# Altium PCB 14871_V1I1.PcbDoc (part 2 of 2)
Units mm, origin at the board's own origin, x right, y up, seen from the top; angles counter-clockwise.
Board outline 80 x 35 mm, 2 copper layers (L1, L2), stack 1.671 mm thick; 58 components, 31 nets, 145 pads, 63 vias.
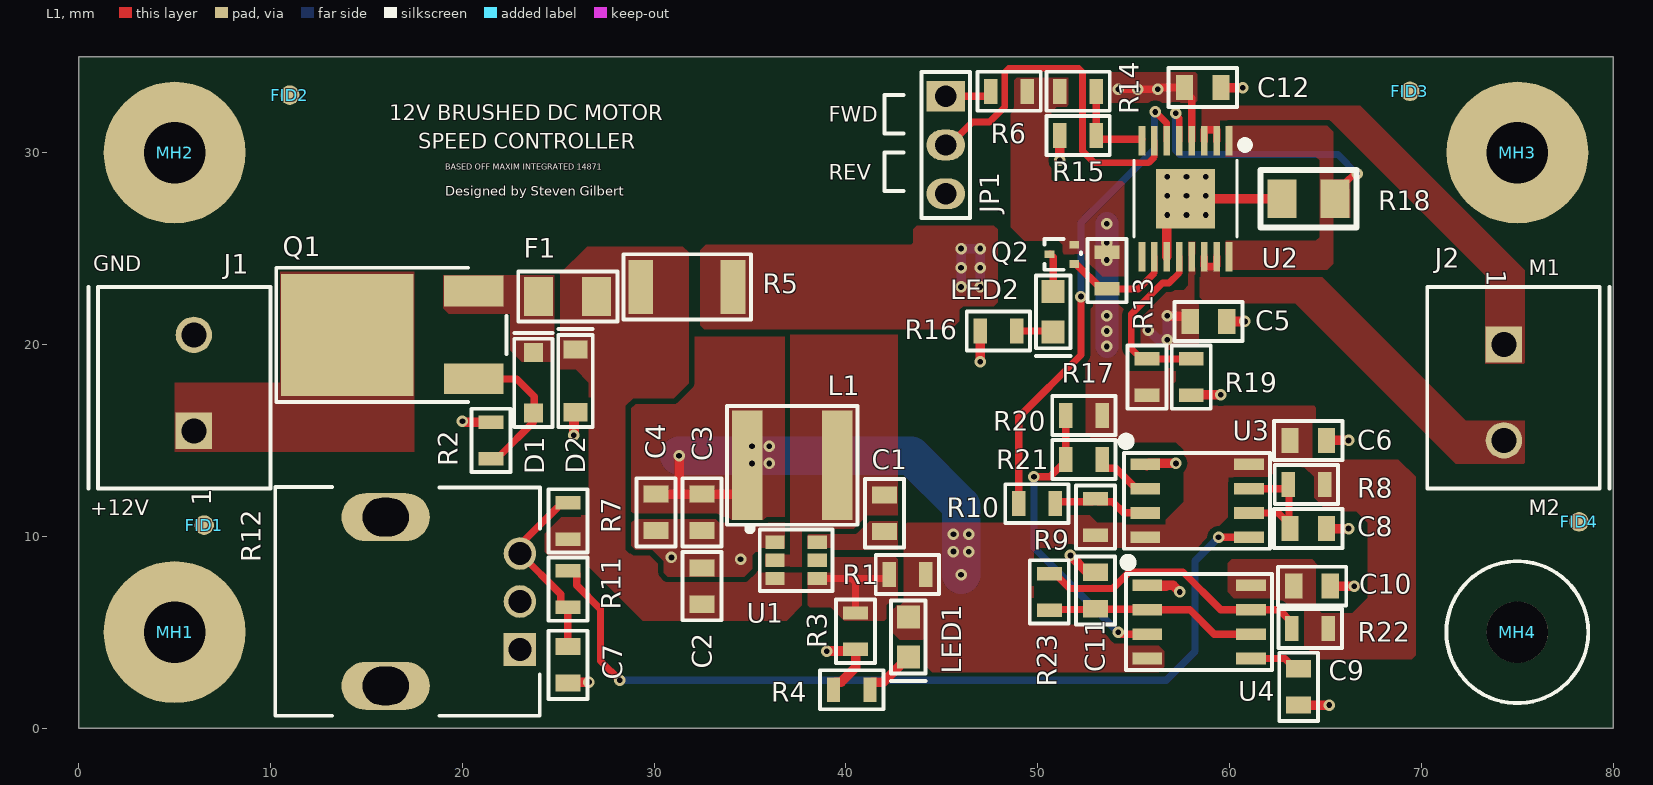
[diagram p0: L1 view]

## Part data (continued)
R14: library part RC0805JR-075K6L, "RES SMD 5K6 OHM 5% 1/8W 0805  Thick Film ±100ppm/C Pad SMD T/R", Case Code (Imperial)=0805, Case Code (Metric)=2012, Manufacturer=Yageo, Max Operating Temperature=155°C, Max Power Dissipation=125mW, Min Operating Temperature=-55°C, Package Quantity=5000, Resistance=5.6kR, Resistance Tolerance=5%, Resistor Type="Thick Film", Supplier Part Number 1=311-5.6KARCT-ND, Temperature Coefficient=100ppm/°C, Voltage Rating=150V, Case/Package=0805, Category="Chip SMD Resistors", ComponentLink1Description=https://datasheet.ciiva.com/2519/pyu-r-int-thick-7-2519283.pdf?src-supplier=Digi-Key, ComponentLink1URL=https://datasheet.ciiva.com/2519/pyu-r-int-thick-7-2519283.pdf?src-supplier=Digi-Key, ComponentLink2Description=https://datasheet.ciiva.com/2519/pyu-r-int-thick-7-2519284.pdf?src-supplier=Digi-Key, ComponentLink2URL=https://datasheet.ciiva.com/2519/pyu-r-int-thick-7-2519284.pdf?src-supplier=Digi-Key, ComponentLink3Description=https://datasheet.ciiva.com/2519/pyu-r-int-thick-7-2519282.pdf?src-supplier=Digi-Key, ComponentLink3URL=https://datasheet.ciiva.com/2519/pyu-r-int-thick-7-2519282.pdf?src-supplier=Digi-Key, ComponentLink4Description=https://datasheet.ciiva.com/15190/getdatasheetpartid-348583-15190060.pdf?src-supplier=Verical, ComponentLink4URL=https://datasheet.ciiva.com/15190/getdatasheetpartid-348583-15190060.pdf?src-supplier=Verical, ComponentLink5Description=https://datasheet.ciiva.com/17086/rc0805-17086095.pdf?src-supplier=Future+Electronics, ComponentLink5URL=https://datasheet.ciiva.com/17086/rc0805-17086095.pdf?src-supplier=Future+Electronics, Construction=Rectangular, Contact Plating=Tin,Lead, Depth=1.25mm, Features="Moisture Resistant", Height=0.5mm, Lead Free="Lead Free", Length=2mm, Manufacturer Part Number=RC0805JR-075K6L, Military Standard=Not, Number of Terminations=2, Packaging="Tape and Reel", Power Rating=125mW, Pricing 1="1=0.100000, 10=0.032000, 100=0.013000, 1000=0.005840, 2500=0.005070 (USD)", Radiation Hardening=No, RoHS=Yes, RoHS Compliant=Yes, Series=RC, Size Code=0805, Stock 1=166799, Supplier 1=Digi-Key, Termination=SMD/SMT, Tolerance=5%, Width=1.25mm
R17: library part RC0805FR-074K02L, "RES SMD 4K02 OHM 1% 1/8W 0805 Thick Film 2.0 x 1.2 mm 100ppm/ C Molded SMD Paper T/R", Case Code (Imperial)=0805, Case Code (Metric)=2012, Manufacturer=Yageo, Max Operating Temperature=155°C, Max Power Dissipation=125mW, Min Operating Temperature=-55°C, Resistance=4.02kR, Resistor Type="Thick Film", Supplier Part Number 1=311-4.02KCRCT-ND, Temperature Coefficient=100ppm/°C, Tolerance=1%, Voltage Rating=150V, Case/Package=0805, Category="Chip SMD Resistors", ComponentLink1Description=https://datasheet.ciiva.com/11808/0900766b8106beab-11808579.pdf?src-supplier=RSComponents, ComponentLink1URL=https://datasheet.ciiva.com/11808/0900766b8106beab-11808579.pdf?src-supplier=RSComponents, ComponentLink2Description=https://datasheet.ciiva.com/12667/rc0805-12667015.pdf?src-supplier=Mouser, ComponentLink2URL=https://datasheet.ciiva.com/12667/rc0805-12667015.pdf?src-supplier=Mouser, ComponentLink3Description=https://datasheet.ciiva.com/15189/getdatasheetpartid-342839-15189978.pdf?src-supplier=Verical, ComponentLink3URL=https://datasheet.ciiva.com/15189/getdatasheetpartid-342839-15189978.pdf?src-supplier=Verical, ComponentLink4Description=https://datasheet.ciiva.com/16771/rc0805-16771996.pdf?src-supplier=Future+Electronics, ComponentLink4URL=https://datasheet.ciiva.com/16771/rc0805-16771996.pdf?src-supplier=Future+Electronics, Construction=Rectangular, Depth=1.25mm, Features="Moisture Resistant", Height=0.5mm, Lead Free="Lead Free", Length=2mm, Manufacturer Part Number=RC0805FR-074K02L, Military Standard=Not, Mount="Surface Mount", Number of Terminations=2, Packaging="Tape and Reel", Power Rating=125mW, Pricing 1="1=0.10000, 10=0.03600, 100=0.01480, 1000=0.00666, 2500=0.00578 (USD)", RoHS=Yes, RoHS Compliant=Yes, Series=RC, Size Code=0805, Stock 1=404687, Supplier 1=Digi-Key, Technology="THICK FILM", Termination=SMD/SMT, Voltage Rating (DC)=150V
R18: library part VSRP1206S1-R100F, "RES SENSE SMD 0R1 OHM 1% 1W 1206", Manufacturer=Cyntec, Package=1206, Supplier Part Number 1=2037-VSRP1206S1-R100FCT-ND, Tolerance=1%, Category="Chip SMD Resistors", Manufacturer Part Number=VSRP1206S1-R100F, Pricing 1="1=0.57000, 10=0.47700, 25=0.40920, 50=0.36820, 100=0.32040, 250=0.28632, 500=0.23180, 1000=0.18748 (USD)", RoHS=Yes, Stock 1=23192, Supplier 1=Digi-Key
R22: library part RC0805FR-073KL, "RES SMD 3K OHM 1% 1/8W 0805 Thick Film ±100ppm/C Pad SMD T/R", Case Code (Imperial)=0805, Case Code (Metric)=2012, Manufacturer=Yageo, Max Operating Temperature=155°C, Max Power Dissipation=125mW, Min Operating Temperature=-55°C, Package Quantity=1, Resistance=3kR, Resistor Type="Thick Film", Supplier Part Number 1=311-3.00KCRCT-ND, Temperature Coefficient=100ppm/°C, Tolerance=1%, Voltage Rating=150V, Case/Package=0805, Category="Chip SMD Resistors", ComponentLink1Description=https://datasheet.ciiva.com/2457/pyu-r-int-thick-7-2457135.pdf?src-supplier=Digi-Key, ComponentLink1URL=https://datasheet.ciiva.com/2457/pyu-r-int-thick-7-2457135.pdf?src-supplier=Digi-Key, ComponentLink2Description=https://datasheet.ciiva.com/2457/pyu-r-int-thick-7-2457136.pdf?src-supplier=Digi-Key, ComponentLink2URL=https://datasheet.ciiva.com/2457/pyu-r-int-thick-7-2457136.pdf?src-supplier=Digi-Key, ComponentLink3Description=https://datasheet.ciiva.com/2457/pyu-r-int-thick-7-2457134.pdf?src-supplier=Digi-Key, ComponentLink3URL=https://datasheet.ciiva.com/2457/pyu-r-int-thick-7-2457134.pdf?src-supplier=Digi-Key, ComponentLink4Description=https://datasheet.ciiva.com/5558/rc0805-5558124.pdf?src-supplier=Mouser, ComponentLink4URL=https://datasheet.ciiva.com/5558/rc0805-5558124.pdf?src-supplier=Mouser, ComponentLink5Description=https://datasheet.ciiva.com/17043/rc0805-17043750.pdf?src-supplier=Future+Electronics, ComponentLink5URL=https://datasheet.ciiva.com/17043/rc0805-17043750.pdf?src-supplier=Future+Electronics, Construction=Rectangular, Depth=1.25mm, Features="Moisture Resistant", Height=0.024inch, Lead Free="Lead Free", Length=2mm, Manufacturer Part Number=RC0805FR-073KL, Military Standard=Not, Mount="Surface Mount", Number of Terminations=2, Packaging="Tape and Reel", Power Rating=125mW, Pricing 1="1=0.10000, 10=0.03600, 100=0.01480, 1000=0.00666, 2500=0.00578 (USD)", RoHS=Yes, RoHS Compliant=Yes, Series=RC, Size Code=0805, Stock 1=518249, Supplier 1=Digi-Key, Termination=SMD/SMT, Voltage Rating (DC)=150V, Width=0.049inch
U1: "4.2V to 18V Input 2A Low IQ Synchronous Buck Converter 6-Pin TSOT-26 T/R", Manufacturer=Diodes, Supplier Part Number 1=31-AP62200WU-7CT-ND, Category="Voltage Regulators - Switching", Manufacturer Part Number=AP62200WU-7, Pricing 1="1=0.43000, 10=0.37100, 25=0.34600, 100=0.27690, 250=0.25712, 500=0.21758, 1000=0.16813 (USD)", RoHS=Yes, RoHS Compliant=Yes, Stock 1=508009, Supplier 1=Digi-Key
U2: "IC Motor Driver 4.5V-36V 16TSSOP", Manufacturer="Analog Devices", Supplier Part Number 1=MAX14871EUE+CT-ND, Category=Uncategorized, Manufacturer Part Number=MAX14871EUE+T, Pricing 1="1=5.19000, 10=4.66500, 25=4.41000, 100=3.82200, 250=3.62600, 500=3.25360, 1000=2.94000 (USD)", RoHS=No, Stock 1=2369, Supplier 1=Digi-Key
U3 U4: "IC OSC SGL TIMER 100KHZ 8-SOIC", Case/Package=SOIC, Frequency=100kHz, High Level Output Current=-200mA, Low Level Output Current=200mA, Manufacturer="Texas Instruments", Max Operating Temperature=70°C, Max Supply Voltage=16V, Min Operating Temperature=0°C, Min Supply Voltage=4.5V, Operating Supply Current=10mA, Package Quantity=1, Quiescent Current=15mA, Supplier Part Number 1=296-6501-1-ND, Category="Timers and Oscillators", ComponentLink1Description=https://datasheet.ciiva.com/46395/1874740-46395978.pdf?src-supplier=Element14, ComponentLink1URL=https://datasheet.ciiva.com/46395/1874740-46395978.pdf?src-supplier=Element14, ComponentLink2Description=https://datasheet.ciiva.com/1233/ne555-1233132.pdf?src-supplier=Digi-Key, ComponentLink2URL=https://datasheet.ciiva.com/1233/ne555-1233132.pdf?src-supplier=Digi-Key, ComponentLink3Description=https://datasheet.ciiva.com/1233/ne555-1233131.pdf?src-supplier=Digi-Key, ComponentLink3URL=https://datasheet.ciiva.com/1233/ne555-1233131.pdf?src-supplier=Digi-Key, ComponentLink4Description=https://datasheet.ciiva.com/1233/ne555-1233133.pdf?src-supplier=Digi-Key, ComponentLink4URL=https://datasheet.ciiva.com/1233/ne555-1233133.pdf?src-supplier=Digi-Key, ComponentLink5Description=https://datasheet.ciiva.com/1139/1874740-1139901.pdf?src-supplier=Element14, ComponentLink5URL=https://datasheet.ciiva.com/1139/1874740-1139901.pdf?src-supplier=Element14, Contact Plating=Gold, Height=1.58mm, Lead Free="Lead Free", Length=4.9mm, Manufacturer Part Number=NE555DR, Mount="Surface Mount", Number of Pins=8, Number of Timers/Counters=1, Packaging="Tape and Reel", Pricing 1="1=0.46000, 10=0.34300, 25=0.30880, 100=0.21350, 250=0.17976, 500=0.14606, 1000=0.11236 (USD)", Radiation Hardening=No, Reach SVHC Compliant=Yes, RoHS=Yes, RoHS Compliant=Yes, Series=-, Stock 1=369283, Supplier 1=Digi-Key, Weight=0.002561oz, Width=3.91mm

## Via types
v1: diameter 0.6, hole 0.3, L1 to L2, tented both sides, 63 vias

## Nets (pads, with @x,y where several pads share a name; then routed paths per layer and width w, separated by ;. In a path a pad name is that pad's centre, name@x,y a point inside that pad or via, vN(x,y) a via of type N, cw(c..) or ccw(c..) an arc to the next point about the centre after c; other vN are vias at no path point)
28KHZ_CLOCK: R20.2 R21.2 U4.3 | length 15.8
  L1 w0.381: v1(49.8,13.1) 50.639,13.1 51.45,13.911 R21.2 R20.2 ; v1(54.2,5) 54.3,4.9 U4.3
  L2 w0.381: v1(49.8,13.1) 49.8,9.4 v1(54.2,5)
28KHZ_CLOCK_R: R21.1 U3.2 | length 3
  L1 w0.381: R21.1 53.35,13.7 53.509,13.54 54.07,13.54 55.125,12.485 U3.2
555_PWM: R9.2 R10.2 U3.3 | length 5.1
  L1 w0.381: R10.2 51,11.8 52.85,11.8 R9.2 53.148,11.802 53.898,11.802 54.477,11.223 55.587,11.223 U3.3
555_PWM_R: R10.1 U2.6 | length 25.1
  L1 w0.356: v1(56.126,32.123) 56.126,32.115 56.725,31.516 U2.6
  L1 w0.381: R10.1 49,16.2 52.25,19.45 v1(52.25,22.5)
  L2 w0.381: v1(52.25,22.5) 52.25,26.35 52.609,26.709 ; 52.609,26.71 53.19,27.291 56.084,30.184 56.084,32.081 v1(56.126,32.123)
+5V: C3.2 C4.2 C6.1 C10.1 L1.2 LED1.A Q2.S R1.1 R6.1 R8.1 R9.1 R13.1 R14.1 R17.1 R20.1 R22.1 U3.4 U3.8 U4.4 U4.8 | length 33.7
  L1 w0.5: C4.2 31.3,12.2 ; v1(31.3,14.2) 31.3,12.2 ; L1.2 34.85,12.75 34.3,12.2 C3.2 31.3,12.2
  L2 w1.2: v1(53.6,19.9) v1(53.6,26.3)
  L2 w2: v1(31.3,14.2) 43.4,14.2 46,11.6 v1(46,8)
  other v1: 45.6,9.203 46.4,9.2 45.6,10.1 46.4,10.1 35.1,13.8 36,13.8 35.1,14.7 36,14.7 53.6,20.7 53.6,21.5 53.6,24.4 53.6,25.3
+12V: C2.2 D2.K F1.2 R5.2 R7.1 U1.3
+12V_DRIVER: C5.2 C12.2 R5.1 U2.4 U2.13 | length 15.2
  L1 w0.4: v1(54.2,33.3) v1(55.2,33.3) v1(56.254,33.3) ; v1@56.354,33.3 56.454,33.4 C12.2 57.65,33.2 58.025,32.825 U2.4
  L1 w0.5: v1(56.75,21.5) 56.769,21.481 57.75,21.481 57.95,21.281 C5.2
  L2 w0.5: v1(46,23) v1(46,24) v1(46,25) v1(47,25) v1(47,24) v1(47,23) ; v1@55.723,20.75 v1(55.75,20.75) 55.777,20.75 56.258,20.269 56.731,20.269 v1(56.75,20.25) v1(56.75,21.5)
+VIN: J1.1 Q1.D
+VIN_REV_PROTECT: D1.K F1.1 Q1.S
BST: C1.2 U1.6
CTRL_VOLTAGE: C7.2 R7.2 R11.2 R12.3 | length 9.9
  L1 w0.381: C7.2 R11.2 25.286,6.3 25.127,6.46 25.127,6.973 R12.3 23.252,9.352 23.252,9.802 25.2,11.75 R7.2
CTRL_VOLTAGE_R: R11.1 U3.5 | length 45.6
  L1 w0.381: R11.1 25.8,8.2 25.96,8.04 25.96,7.441 27.2,6.2 27.2,3.5 v1(28.2,2.5) ; v1(59.425,9.945) U3.5
  L2 w0.381: v1(28.2,2.5) 56.7,2.5 58.2,4 58.2,8.719 v1(59.425,9.945)
DIR: JP1.2 U2.7 | length 19
  L1 w0.356: JP1.2 45.4,30.4 46.6,31.6 47.484,31.6 48.278,32.394 48.278,34.192 48.486,34.4 52.114,34.4 52.322,34.192 52.322,31.828 52.322,30.094 52.946,29.47 55.759,29.47 56.075,29.786 U2.7
FB: R1.2 R3.1 U1.4 | length 5.7
  L1 w0.381: U1.4 40.295,7.8 ; R3.1 40.5,7.595 40.295,7.8 ; R1.2 42.25,7.959 42.09,7.8 40.295,7.8
GND: C2.1 C3.1 C4.1 C5.1 C6.2 C7.1 C8.1 C9.1 C10.2 C11.1 C12.1 D2.A J1.2 JP1.3 MH1.1 MH2.1 MH3.1 R2.2 R3.2 R4.2 R12.1 R12.2 R15.2 R16.2 R18.2 R19.2 U1.1 U2.11 U2.EPAD U3.1 U4.1 | length 37.8
  L1 w0.5: v1(20,16) 20.027,16 20.077,15.95 R2.2 ; C7.1 25.531,2.381 26.581,2.381 v1(26.6,2.4) ; v1@25.8,15.53 v1(25.8,15.265) 25.819,15.284 25.819,16.384 D2.A ; v1(39,4) 39.019,4.019 40.419,4.019 R3.2 40.5,3.15 39.75,2.4 39.45,2.4 39.35,2.3 R4.2 ; v1(47,19.1) R16.2 ; v1(51.148,29.602) 51.148,30.798 51.2,30.85 R15.2 ; v1(51.7,9) 52.577,8.123 C11.1 ; U3.1 55.673,13.677 55.795,13.8 v1(57.2,13.8) ; 56.688,7.385 55.755,7.385 U4.1 57.06,7.44 v1(57.4,7.1) ; U2.11 56.725,26.625 U2.EPAD R18.2 ; R19.2 58.032,17.382 v1(59.543,17.382) ; C12.1 59.572,33.378 v1(60.682,33.378) ; C5.1 v1(60.8,21.2) ; C9.1 v1(65.2,1.2) ; C8.1 v1(66.2,10.4) ; C6.2 v1(66.2,15) ; C10.2 v1(66.5,7.4)
  L2 w0.5: v1(56.75,27.75) v1(56.75,28.75) v1(57.75,28.75) ; v1(57.75,26.75) v1(58.75,26.75)
  other v1: 34.5,8.8 30.9,8.9 56.75,26.75 57.75,27.75 58.75,27.75 58.75,28.75
M1: J2.1 U2.2 U2.3 | length 1.8
  L1 w0.4: U2.3 58.675,31.177 58.698,31.2 59.302,31.2 59.325,31.177 U2.2
M2: J2.2 U2.14 U2.15 | length 1.6
  L1 w0.4: U2.14 58.675,24.121 58.748,24.049 59.252,24.049 59.325,24.121 U2.15
MODE: R14.2 R15.1 U2.8 | length 4.8
  L1 w0.381: R14.2 53.05,31.36 53.05,30.86 53.21,30.7 U2.8@55.412,30.7
NetC8_2: C8.2 R8.2 U3.6 U3.7 | length 6.8
  L1 w0.381: U3.6 62.535,11.215 C8.2@63.1,10.65 ; U3.7 62.935,12.485 63.1,12.65 C8.2@63.1,10.65 ; C8.2 63.1,10.45 C8.2@63.1,10.65
NetC9_2: C9.2 U4.5 | length 2.7
  L1 w0.381: U4.5 62.87,3.63 63.4,3.1 C9.2
NetC11_2: C11.2 R23.2 U4.2 U4.6 | length 11.1
  L1 w0.381: R23.2 50.637,6.187 52.964,6.187 C11.2 53.027,6.197 55.673,6.197 U4.2 57.93,6.17 59.2,4.9 U4.6
NetD1_A: D1.A Q1.G R2.1 | length 8.1
  L1 w0.381: Q1.G 20.614,18.2 22.827,18.2 23.74,17.286 23.74,16.76 24,16.5 23.69,16.19 23.69,15.941 21.96,14.21 21.8,14.05 R2.1
NetJP1_1: JP1.1 R6.2 | length 2.5
  L1 w0.381: JP1.1 47.39,32.94 47.55,33.1 R6.2
NetLED1_K: LED1.K R4.1 | length 2.9
  L1 w0.5: R4.1 41.25,2.28 41.35,2.38 41.93,2.38 LED1.K
NetLED2_A: LED2.A Q2.D | length 2.1
  L1 w0.381: Q2.D 50.665,24.7 50.8,24.565 LED2.A
NetLED2_K: LED2.K R16.1 | length 1.9
  L1 w0.381: R16.1 50.75,20.7 LED2.K
NetR22_2: R22.2 R23.1 U4.7 | length 14.7
  L1 w0.381: R23.1 50.9,8.05 51.667,7.283 53.911,7.283 54.764,8.135 57.565,8.135 59.53,6.17 U4.7 62.58,6.17 63.25,5.5 R22.2
nFAULT: Q2.G R13.2 U2.10 | length 5.9
  L1 w0.356: R13.2 55.238,22.9 56.075,23.737 U2.10
  L1 w0.381: Q2.G 51.909,24.19 52.01,24.19 53.3,22.9 R13.2
SNS: R18.1 U2.1 U2.5 U2.16 | length 15.3
  L1 w0.356: v1(57.185,32.052) 57.185,31.966 57.375,31.775 U2.5 ; R18.1 66.072,28.172 66.072,28.472 66.5,28.9 v1(66.65,28.9)
  L2 w0.356: v1(57.185,32.052) 57.185,30.108 57.393,29.9 65.65,29.9 v1(66.65,28.9)
SW: C1.1 L1.1 U1.2
VREF: R17.2 R19.1 U2.12 | length 9.4
  L1 w0.356: U2.12@57.375,24.575 57.375,23.737 56.838,23.2 56.5,23.2 54.867,21.567 54.867,19.783 55.4,19.25 R17.2 R19.1
pads on no net: FID1.1 FID2.1 FID3.1 FID4.1 MH4.1 R12.S1 R12.S2 U1.5 U2.9

## Polygon pours and split planes (outlines as drawn)
FB on L1 "FB_L01_P008" (solid, remove dead copper, pour order 8): 42.7,8.8 42.7,6.7 42.5,6.5 42.2,6.5 42.1,6.4 42.1,5.7 42,5.6 39.9,5.6 39.2,6.3 38.1,6.3 38,6.4 38,8.2 38.1,8.3 39.1,8.3 39.1,8.8 39.2,8.9 42.6,8.9
SW on L1 "SW_L01_P006" (solid, remove dead copper, pour order 6): 35.8,8.4 37.9,8.4 37.9,10.4 40.4,10.4 41.1,11.1 42.7,11.1 42.7,20.5 37.1,20.5 37.1,9.2 37,9.1 35.8,9.1
GND on L1 "GND_L01_P009" (solid, remove dead copper, pour order 9): 36.9,9.3 36.9,10.6 36.8,10.7 33.4,10.7 33.2,10.9 29,10.9 28.8,10.7 28.8,9.5 29,9.3 29.9,9.3 30.5,8.7 30.5,8.1 30.7,7.9 34.7,7.9 35.1,8.3 35.1,9 35.3,9.2 36.8,9.2
+12V on L1 "+12V_L01_P010" (solid, remove dead copper, pour order 10): 37.7,8.2 37.7,6.4 36.9,5.6 29.4,5.6 26.2,8.8 24.7,8.8 24.3,9.2 24.3,10.4 24.9,11 26.2,11 26.2,11.2 26.6,11.6 26.6,18 25.9,18.7 25,18.7 24.9,18.8 24.9,23.5 26.5,25.1 31.5,25.1 31.8,24.8 31.8,17.97 31.03,17.2 28.9,17.2 28.5,16.8 28.5,9.3 28.7,9.1 29.7,9.1 30.2,8.6 30.2,8 30.5,7.7 34.9,7.7 35.5,8.3 37.6,8.3
+5V on L1 "+5V_L01_P013" (solid, remove dead copper, pour order 13): 43,10.5 43,6.8 42.8,6.6 42.6,6.6 42.3,6.3 42.3,5.1 42.8,4.6 44,4.6 44.2,4.4 44.2,3.2 44.5,2.9 56.3,2.9 56.6,3.2 56.6,4 56.2,4.4 54,4.4 53,5.4 49.9,5.4 49.8,5.5 49.8,9.2 50,9.4 58.3,9.4 59.9,11 59.9,12.8 60.2,13.1 62.1,13.1 62.6,13.6 63.9,13.6 64.4,13.1 64.4,12 65.1,11.3 66.6,11.3 67.2,10.7 67.2,6.8 66.4,6 64.8,6 64.6,6.2 64.6,8.5 64.3,8.8 60.1,8.8 59.9,8.6 59.9,7.1 60.3,6.7 62.6,6.7 63.3,6 63.8,6 63.9,5.9 63.9,4.3 64.6,3.6 69.5,3.6 69.7,3.8 69.7,13.1 68.8,14 64.8,14 64.5,14.3 64.5,16.7 64.4,16.8 57.3,16.8 57.2,16.9 57.2,18.7 57.1,18.8 54.8,18.8 54.6,19 54.6,21.7 54.2,22.1 52.9,22.1 52.9,22 52.5,21.6 52.5,15.4 53,14.9 57.2,14.9 57.6,14.5 57.6,11.8 56.5,10.7 53.1,10.7 52.7,11.1 51.6,11.1 51.2,10.7 46,10.7 43.2,10.7
+5V on L1 "+5V_L01_P014" (solid, remove dead copper, pour order 14): 54.5,23.5 54.5,28.4 54.4,28.5 50.8,28.5 50.7,28.6 50.7,32.1 51,32.4 51.5,32.4 51.6,32.5 51.6,34 51.5,34.1 49.1,34.1 48.6,33.6 48.6,26.1 49.3,25.4 51.1,25.4 51.3,25.2 51.3,24.7 51.5,24.5 52.3,24.5 53.4,23.4 54.4,23.4
M2 on L1 "M2_L01_P017" (solid, remove dead copper, pour order 17): 58.45,24.25 59.55,24.25 59.6,24.2 59.6,23.65 59.75,23.5 64.825,23.5 72.3,16.025 75.375,16.025 75.375,13.825 75.325,13.775 71.8,13.775 63.425,22.15 58.75,22.15 58.45,22.45
+12V_DRIVER on L1 "+12V_DRIVER_L01_P022" (solid, remove dead copper, pour order 22): 58.3,32.7 58.2,32.6 53.3,32.6 52.875,33.025 53.2,33.35 53.2,33.6 53.8,34.2 58.2,34.2 58.3,34.1
+12V_DRIVER on L1 "+12V_DRIVER_L01_P019" (solid, remove dead copper, pour order 19): 57.85,25.35 58.2,25.35 58.2,22.4 58.4,22.2 58.4,19.775 58.325,19.7 55.375,19.7 55.2,19.875 55.2,21.4 56.625,22.825 57.6,22.825 57.85,23.075
SNS on L1 "SNS_L01_P015" (solid, remove dead copper, pour order 15): 59.8,31.4 59.8,29.8 64.5,29.8 64.7,29.6 64.7,25.6 64.5,25.4 59.8,25.4 59.8,23.9 65.1,23.9 65.4,24.2 65.4,26.6 66.3,26.6 66.3,28.6 65.4,28.6 65.4,31.1 65.1,31.4
M1 on L1 "M1_L01_P016" (solid, remove dead copper, pour order 16): 58.475,31.025 59.525,31.025 59.525,31.625 65.3,31.625 73.325,23.6 73.325,19 75.325,19 75.375,19.05 75.375,23.875 73.325,25.925 66.8,32.45 58.625,32.45 58.471,32.296 58.471,30.992
+5V on L1 "+5V_L01_P012" (solid, remove dead copper, pour order 12): 36.794,10.7 36.794,20.4 32,20.4 32,17.8 31.2,17 28.9,17 28.693,16.787 28.7,11.2 28.9,11 33.5,11 33.8,10.7
+12V_DRIVER on L1 "+12V_DRIVER_L01_P011" (solid, remove dead copper, pour order 11): 32.4,24.9 32.4,21 32.6,20.8 45.5,20.8 45.9,21.2 45.9,21.8 46.1,22 47.7,22 47.9,22.2 47.9,26 47.7,26.2 43.7,26.2 43.5,26 43.5,25.3 43.4,25.2 32.7,25.2
BST on L1 "BST_L01_P007" (solid, remove dead copper, pour order 7): 38,10.1 38,9.3 42.7,9.3 42.7,10.9 41,10.9 40.2,10.1
+VIN_REV_PROTECT on L1 "+VIN_REV_PROTECT_L01_P001" (solid, remove dead copper, pour order 1): 19,23.6 19,21.9 19.3,21.6 22.5,21.6 22.5,19.7 23.1,19.1 24.7,19.1 24.8,19.2 24.8,23.6
+VIN on L1 "+VIN_L01_P000" (solid, remove dead copper, pour order 0): 5,18 5,14.4 17.5,14.4 17.5,23.8 10.5,23.8 10.5,18
GND on L2 "GND_L02_P024" (solid, remove dead copper, pour order 24): 0,35 0,0 80,0 80,35
+12V_DRIVER on L2 "+12V_DRIVER_L02_P021" (solid, remove dead copper, pour order 21): 45.7,26.2 45.5,26 45.5,22.1 45.6,22 47.1,22 52.3,16.8 57,16.8 57.4,17.2 57.4,22 56.7,22.7 55.4,22.7 54.6,21.9 54.6,20.9 54.4,20.7 52.8,20.7 51.6,21.9 51.6,26.3 55.5,30.2 55.5,32.5 55.6,32.6 56.7,32.6 56.9,32.8 56.9,34.2 56.7,34.4 54.2,34.4 52.9,33.1 52.9,30.6 48.5,26.2

## Silkscreen, mask and mechanical layers (free items; w line width, h text height)
Top Overlay:
  lines w0.2: 43,28 42,28 42,30 43,30 ; 43,31 42,31 42,33 43,33
  text "12V BRUSHED DC MOTOR" at 16.2,31.7 h0.8
  text "FWD" at 39.1,31.6 h0.8
  text "SPEED CONTROLLER" at 17.7,30.2 h0.8
  text "BASED OFF MAXIM INTEGRATED 14871" at 19.1,29.1 h0.3
  text "REV" at 39.1,28.6 h0.8
  text "Designed by Steven Gilbert" at 19.1,27.767 h0.5
  text "GND" at 0.752,23.82 h0.8
  text "M1" at 75.6,23.6 h0.8
  text "+12V" at 0.6,11.1 h0.8
  text "M2" at 75.6,11.1 h0.8
Mechanical Drawing:
  circle w1.016: c75,30 r1.6
  circle w1.016: c75,5 r1.6
  circle w1.016: c5,5 r1.6
  circle w1.016: c5,30 r1.6
  lines w1.016: 0,0 80,0 80,35 0,35 0,0
  text "MECHANICAL DRAWING" at 22.8,42.3 h2
  text "Units : mm" at -25.45,-5.2 h1
  text "Scale : 1:1" at -25.7,-7.7 h1
Manufacturing Notes:
  lines w0.2: -2.5,-23 110,-23 ; -2.5,-27.5 110,-27.5 110,-15 -2.5,-15 -2.5,-27.5
  text "Board Info /  / 1. FINISHED PANEL THICKNESS IS NOT CRITICAL: TO BE APPROXIMATELY 1.6mm /  / 2. COMPONENT IDENT: COLOUR TO BE WHITE" at -0.944,94.363 h2.03
  text "Files / *.GTO - Top Overlay / *.GTP - Top Paste / *.GTS - Top Solder / *.GTL - L1 (Positive) / *.GBL - L2 (Positive) / *.GBS - Bottom Solder / *.GBO - Bottom Overlay / *.GM2 - Mechanical Drawing / *.GM3 - Manufacturing Notes / *.GM28 - Board Outline" at -1,50 h2.03
  text "MAX 14871 DC MOTOR DRIVER" at -1.865,-21.865 h4.57
  text "Drawn by Steven Gilbert" at -2.094,-26.416 h2.03
Board Outline:
  the board outline again, w0.3
Mechanical 29:
  text "ASSEMBLY TOP MAX 14871 DC MOTOR DRIVER" at 15.3,40.3 h1
  text "'.VariantName'" at 53.8,40.3 h1

## Dimensions
80,0 to 75,30.25 on Mechanical Drawing
0,35 to 75,30.25 on Mechanical Drawing
80,0 to 75,4.9 on Mechanical Drawing
0,35 to 5,29.9 on Mechanical Drawing
0,0 to 80,0 on Mechanical Drawing
0,35 to 0,0 on Mechanical Drawing

## Text inside footprints (layer, text, board x,y; h text height)
J1: Top Overlay "1" at 6.9,11.6 h1 r90
J2: Top Overlay "1" at 73.4,23.9 h1 r270